# EAGLE board Screw (EAGLE 7.7.0)
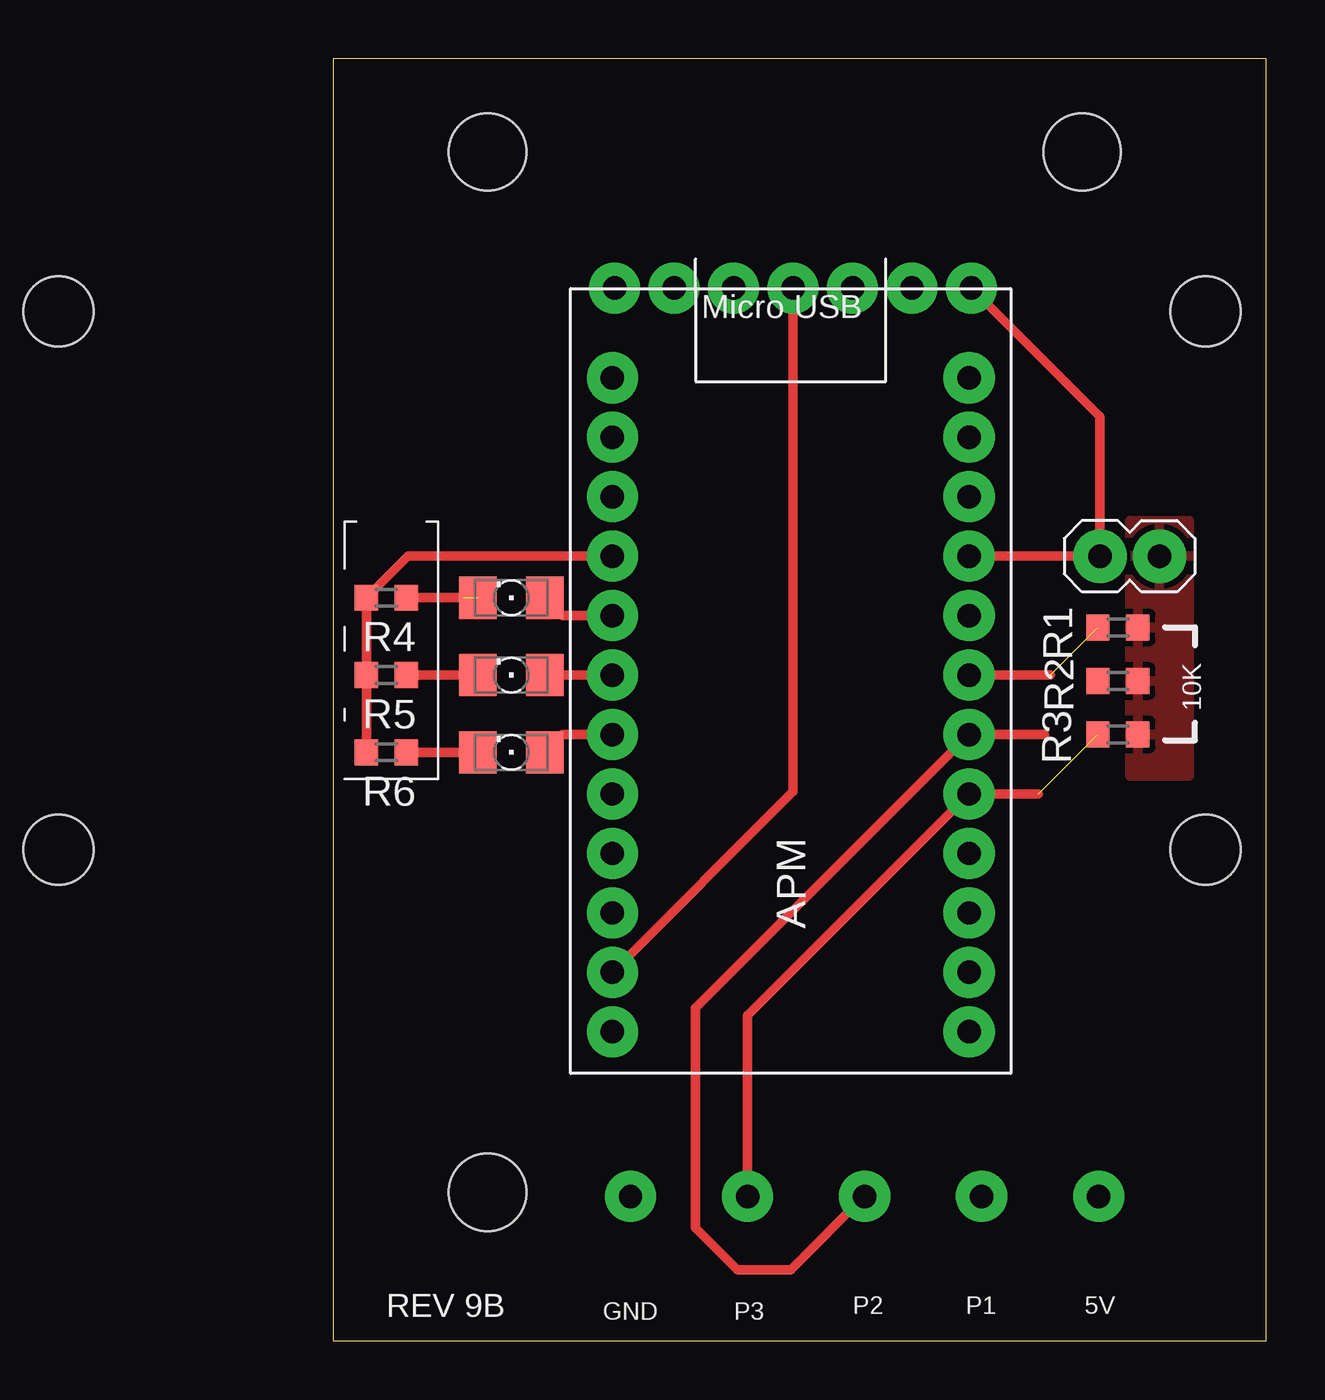
[diagram p0: board, top side]
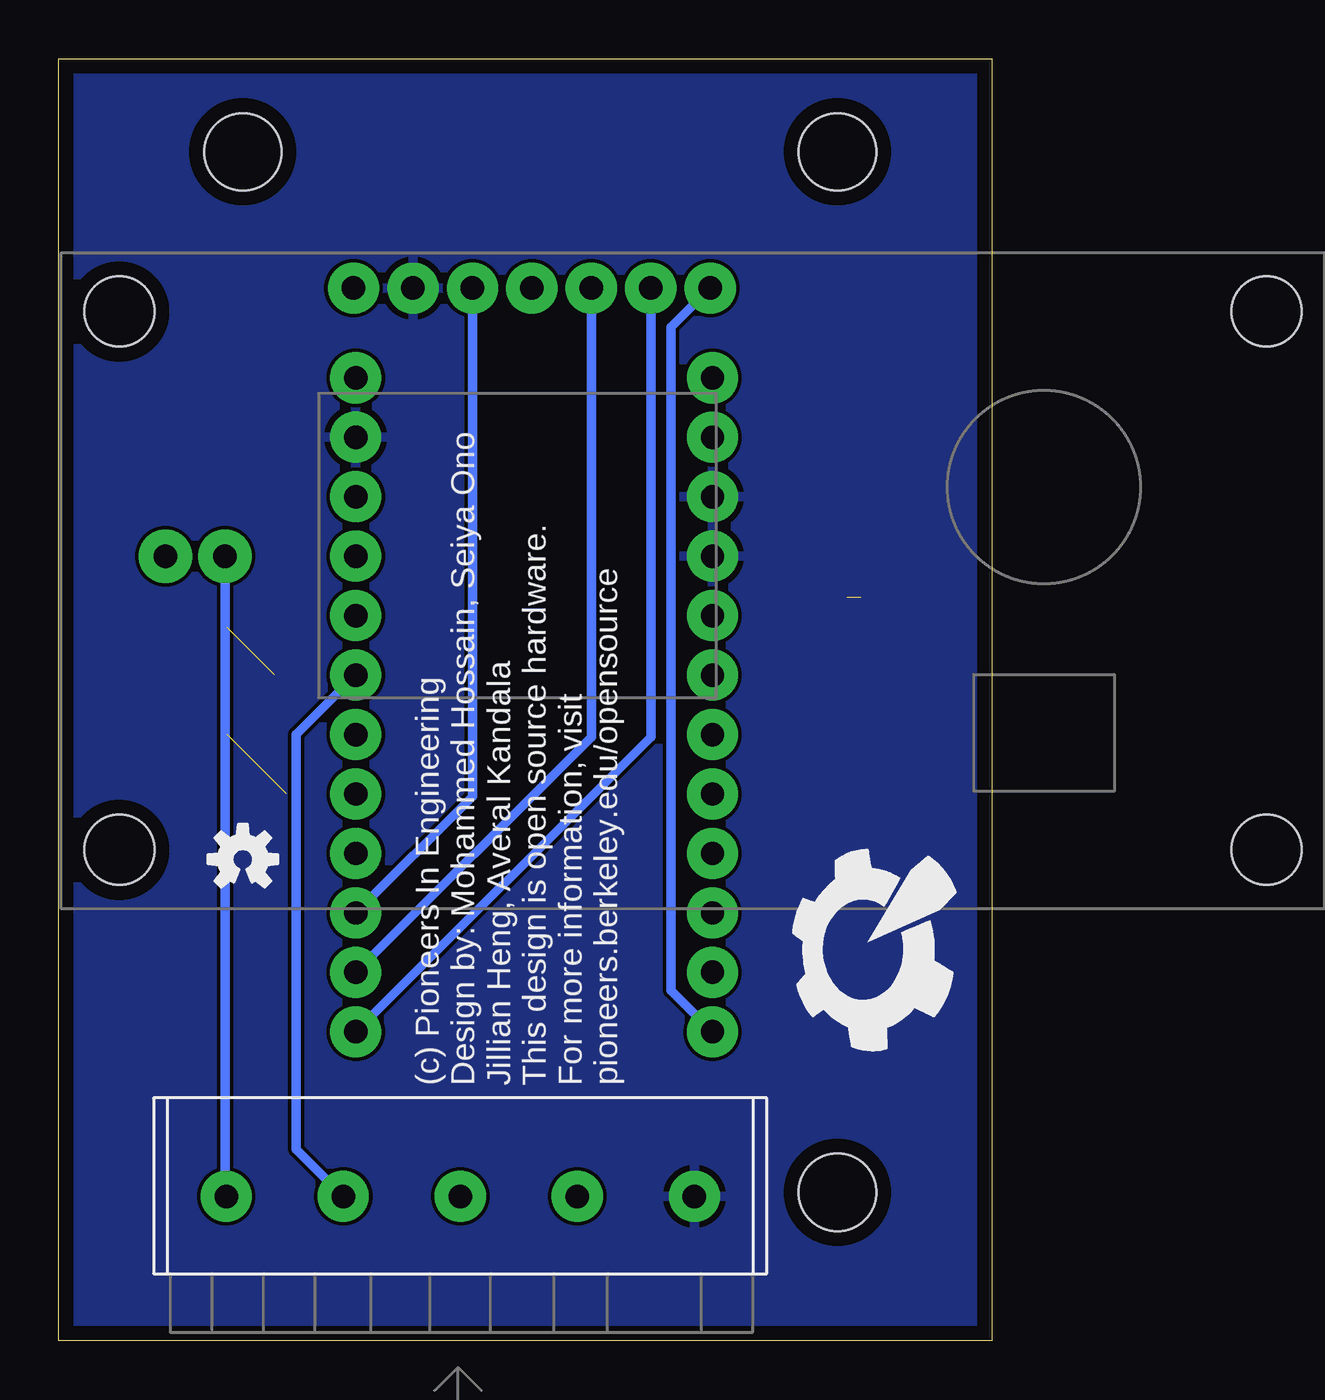
[diagram p1: board, bottom side, seen from below]

Size 39.88 x 54.79 mm. Coordinates in mm from the lower left corner, seen from the top.
Outline: 0,0 39.88,0 39.88,54.79 0,54.79 0,0
Copper layers (1*16): Top 2mil / dielectric 9mil / Bottom 2mil
Design rules "pie": minimum track width 6mil, minimum drill 15mil, track to track 6mil, track to pad 6mil, pad to pad 6mil, via to via 6mil, smd to smd 6mil, copper to edge 25mil, drill to drill 7mil, minimum pad ring 7mil, minimum via ring 7mil, stop-mask expansion 3mil, vias tented up to drill 21mil, thermal gap 10mil

## Footprints (pad centres in the part's own frame; a part is rotated, then mirrored left to right if it is on the bottom)
JUMPER = drill 1 pad 2.286: P$1 -1.27,0; P$2 1.27,0
ARDUINO_PRO_MICRO = drill 1 pad 2.184: 2 1.778,19.558; 3 1.778,17.018; 4 1.778,14.478; 5 1.778,11.938; 6 1.778,9.398; 7 1.778,6.858; 8 1.778,4.318; 9 1.778,1.778; 10 17.018,1.778; 14 17.018,6.858; 15 17.018,9.398; 16 17.018,4.318; A0 17.018,11.938; A1 17.018,14.478; A2 17.018,17.018; A3 17.018,19.558; GND@0 1.778,24.638; GND@1 1.778,22.098; GND@2 17.018,27.178; RAW 17.018,29.718; RST 17.018,24.638; RXI 1.778,27.178; TXO 1.778,29.718; VCC 17.018,22.098
VNH2SP30_MOTOR_CONTROLLER = drill 1 pad 2.184: +5V 41.5,1.5; CS 33.88,1.5; EN 36.42,1.5; GND 38.96,1.5; INA 31.34,1.5; INB 28.8,1.5; PMW 26.26,1.5 | hole 3: 2.5,25.5; 2.5,2.5; 51.5,2.5; 51.5,25.5
FKIT-LED-1206 = smd 1.6 x 1.803: A -1.422,0; C 1.422,0
R0603 = smd 1 x 1.1: 1 -0.85,0; 2 0.85,0
5PIN_SCREW = drill 1 pad 2.184: P$1 3.1,3.3; P$2 8.1,3.3; P$3 13.1,3.3; P$4 18.1,3.3; P$5 23.1,3.3
STAND-OFF = hole 3.302: 0,0

## Placement (x,y rotation side)
5V_JUMPER  JUMPER  [JUMPER]  34.04,33.53 0 top
APM  ARDUINO_PRO_MICRO  [ARDUINO_PRO_MICRO]  10.16,11.43 0 top
BR1  VNH2SP30_MOTOR_CONTROLLER  [VNH2SP30_MOTOR_CONTROLLER]  -14.22,46.48 180 bottom
LED1  RED  [FKIT-LED-1206]  7.62,31.75 180 top
LED2  YELLOW  [FKIT-LED-1206]  7.62,28.45 180 top
LED3  GREEN  [FKIT-LED-1206]  7.62,25.15 180 top
R1  10K  [R0603]  33.53,30.48 0 top
R2  10K  [R0603]  33.53,28.19 0 top
R3  10K  [R0603]  33.53,25.91 0 top
R4  330  [R0603]  2.29,31.75 180 top
R5  330  [R0603]  2.29,28.45 180 top
R6  330  [R0603]  2.29,25.15 180 top
ST1  [5PIN_SCREW]  35.81,2.88 0 bottom
U$1  [STAND-OFF]  32,50.8 0 top
U$3  [PIE-LOGO-SMALL]  5.33,17.02 90 bottom
U$4  [OSHW-LOGO-S]  32,20.57 0 bottom
U$5  [STAND-OFF]  6.6,50.8 0 top
U$6  [STAND-OFF]  6.6,6.35 0 top

## Library data of the parts
5V_JUMPER APM BR1 ST1 U$1 U$3-U$6 = pie
LED1-LED3 = pie; PIE-INT-REF-NUM: LED
R1-R3 = resistor
R4-R6 = pie; PIE-INT-REF-NUM: RESISTOR-GENERIC

## Nets
5V: 5V_JUMPER.P$2 R1.2 R2.2 R3.2
CS: APM.8 BR1.CS
EN: APM.14 BR1.EN
GND: APM.GND@0 APM.GND@1 APM.GND@2 BR1.GND R4.2 R5.2 R6.2 ST1.P$5
INA: APM.16 BR1.INA
INB: APM.10 BR1.INB
LED1: APM.2 LED1.A
LED2: APM.3 LED2.A
LED3: APM.4 LED3.A
N$2: LED1.C R4.1
N$4: LED2.C R5.1
N$6: LED3.C R6.1
P1: APM.A2 R1.1 ST1.P$2
P2: APM.A1 ST1.P$3
P3: APM.A0 R3.1 ST1.P$4
PWM: APM.9 BR1.PMW
VCC: 5V_JUMPER.P$1 APM.VCC BR1.+5V ST1.P$1

## Tracks (layer width: path | path; a pad name or v marks a point on that pad's centre or on a via)
5V
  pour Top: 34.04,35.05 36.58,35.05 36.58,24.13 34.04,24.13
CS
  Top 0.406: BR1.CS 19.66,23.47 APM.8
EN
  Bottom 0.406: BR1.EN 22.2,23.27 APM.14
GND
  Top 0.406: R6.2 R5.2 R4.2 3.21,33.53 APM.GND@1
  pour Bottom: 0,54.61 39.88,54.61 39.88,0 0,0
INA
  Bottom 0.406: BR1.INA 17.12,25.81 APM.16
INB
  Bottom 0.406: BR1.INB 14.58,25.81 APM.10
LED1
  Top 0.406: LED1.A 9.8,30.99 APM.2
LED2
  Top 0.406: LED2.A APM.3
LED3
  Top 0.406: LED3.A 9.8,25.91 APM.4
N$2  (1 unrouted)
  Top 0.406: R4.1 5.59,31.75
N$4
  Top 0.406: LED2.C R5.1
N$6
  Top 0.406: R6.1 LED3.C
P1  (1 unrouted)
  Top 0.406: APM.A2 30.65,28.45
  Bottom 0.406: APM.A2 29.72,25.91 29.72,8.18 ST1.P$2
P2
  Top 0.406: 30.39,25.91 APM.A1 15.49,14.22 15.49,4.83 17.27,3.05 19.56,3.05 22.69,6.18 ST1.P$3
P3  (1 unrouted)
  Top 0.406: ST1.P$4 17.71,13.9 APM.A0 30.14,23.37
PWM
  Bottom 0.406: BR1.PMW 13.72,43.3 13.72,14.99 APM.9
VCC
  Top 0.406: APM.VCC 5V_JUMPER.P$1 32.77,39.49 BR1.+5V
  Bottom 0.406: ST1.P$1 32.77,6.18 5V_JUMPER.P$1

## Text on the board
bPlace: (c) Pioneers In Engineering / Design by: Mohammed Hossain, Seiya Ono / Jillian Heng, Averal Kandala / This design is open source hardware. / For more information, visit / pioneers.berkeley.edu/opensource
tNames: 10K | REV 9B | P2 | P1 | 5V | GND | P3